# Altium PCB LV_hairDrier.PcbDoc
Units mil, origin at the board's own origin, x right, y up, seen from the top; angles counter-clockwise.
Board outline 750 x 750 mil, 4 copper layers (Top Layer, GND, SIGNAL, Bottom Layer), stack 23.756 mil thick; 49 components, 27 nets, 136 pads, 81 vias.
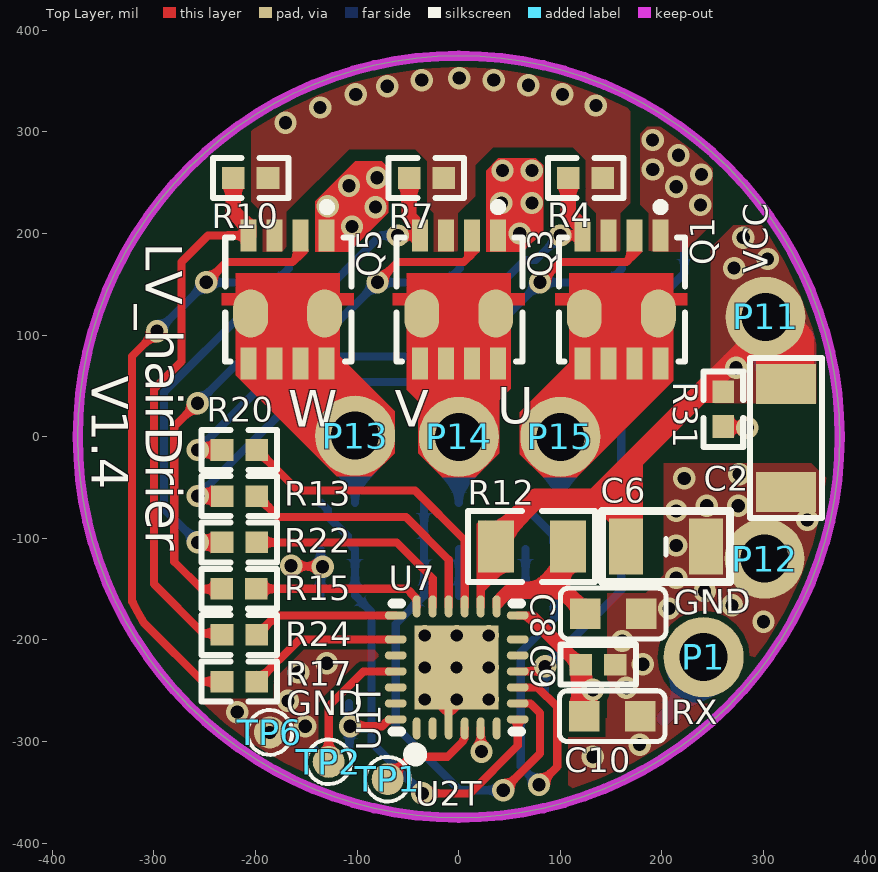
[diagram p0: Top Layer view]
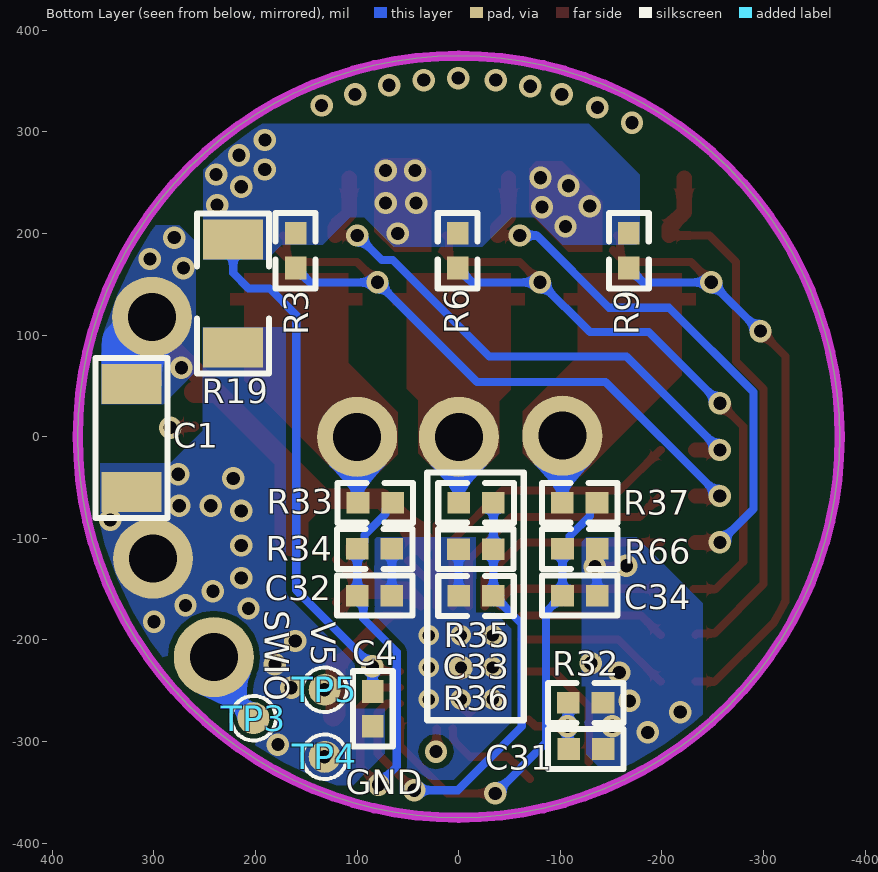
[diagram p1: Bottom Layer view, seen from below]
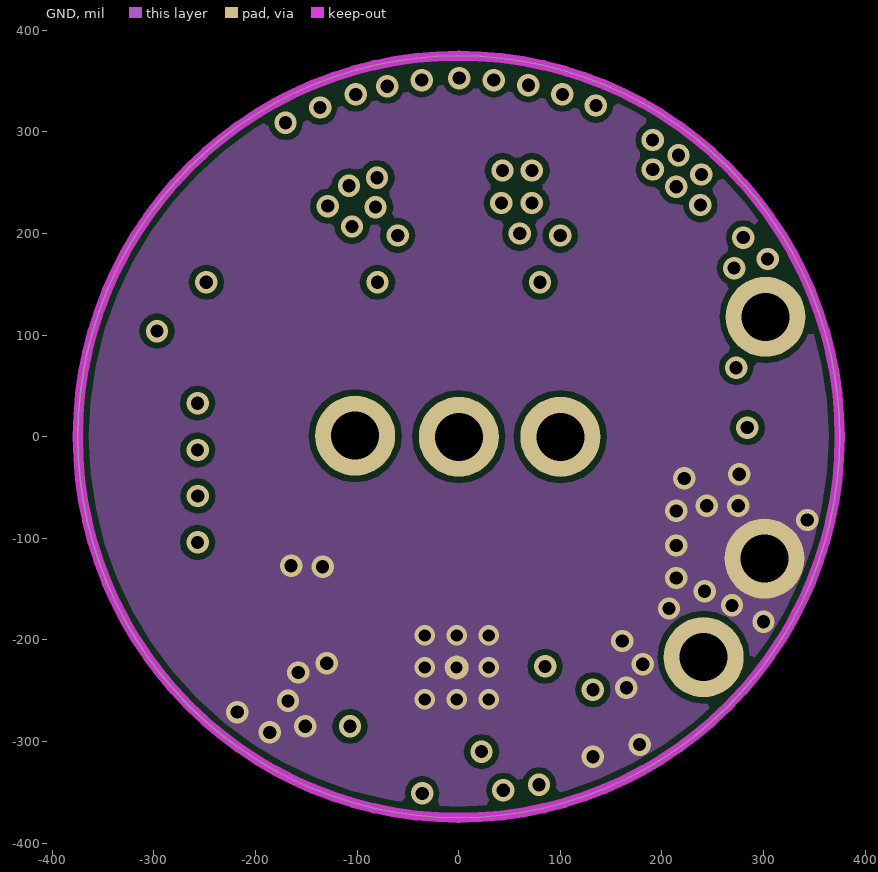
[diagram p2: GND]
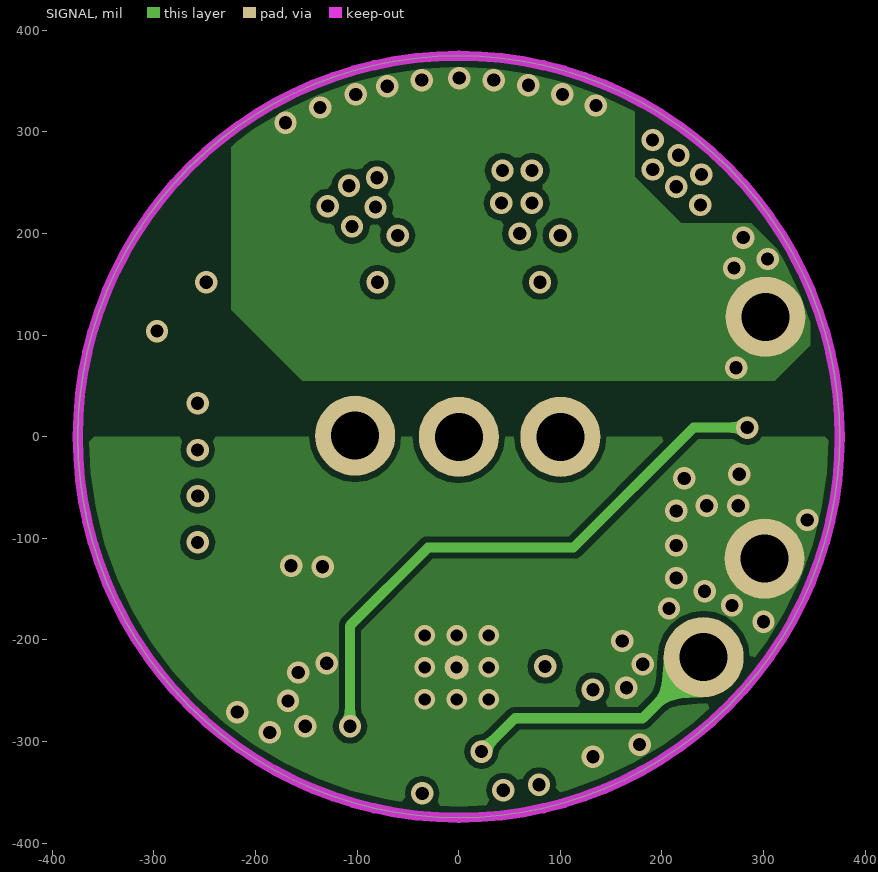
[diagram p3: SIGNAL]
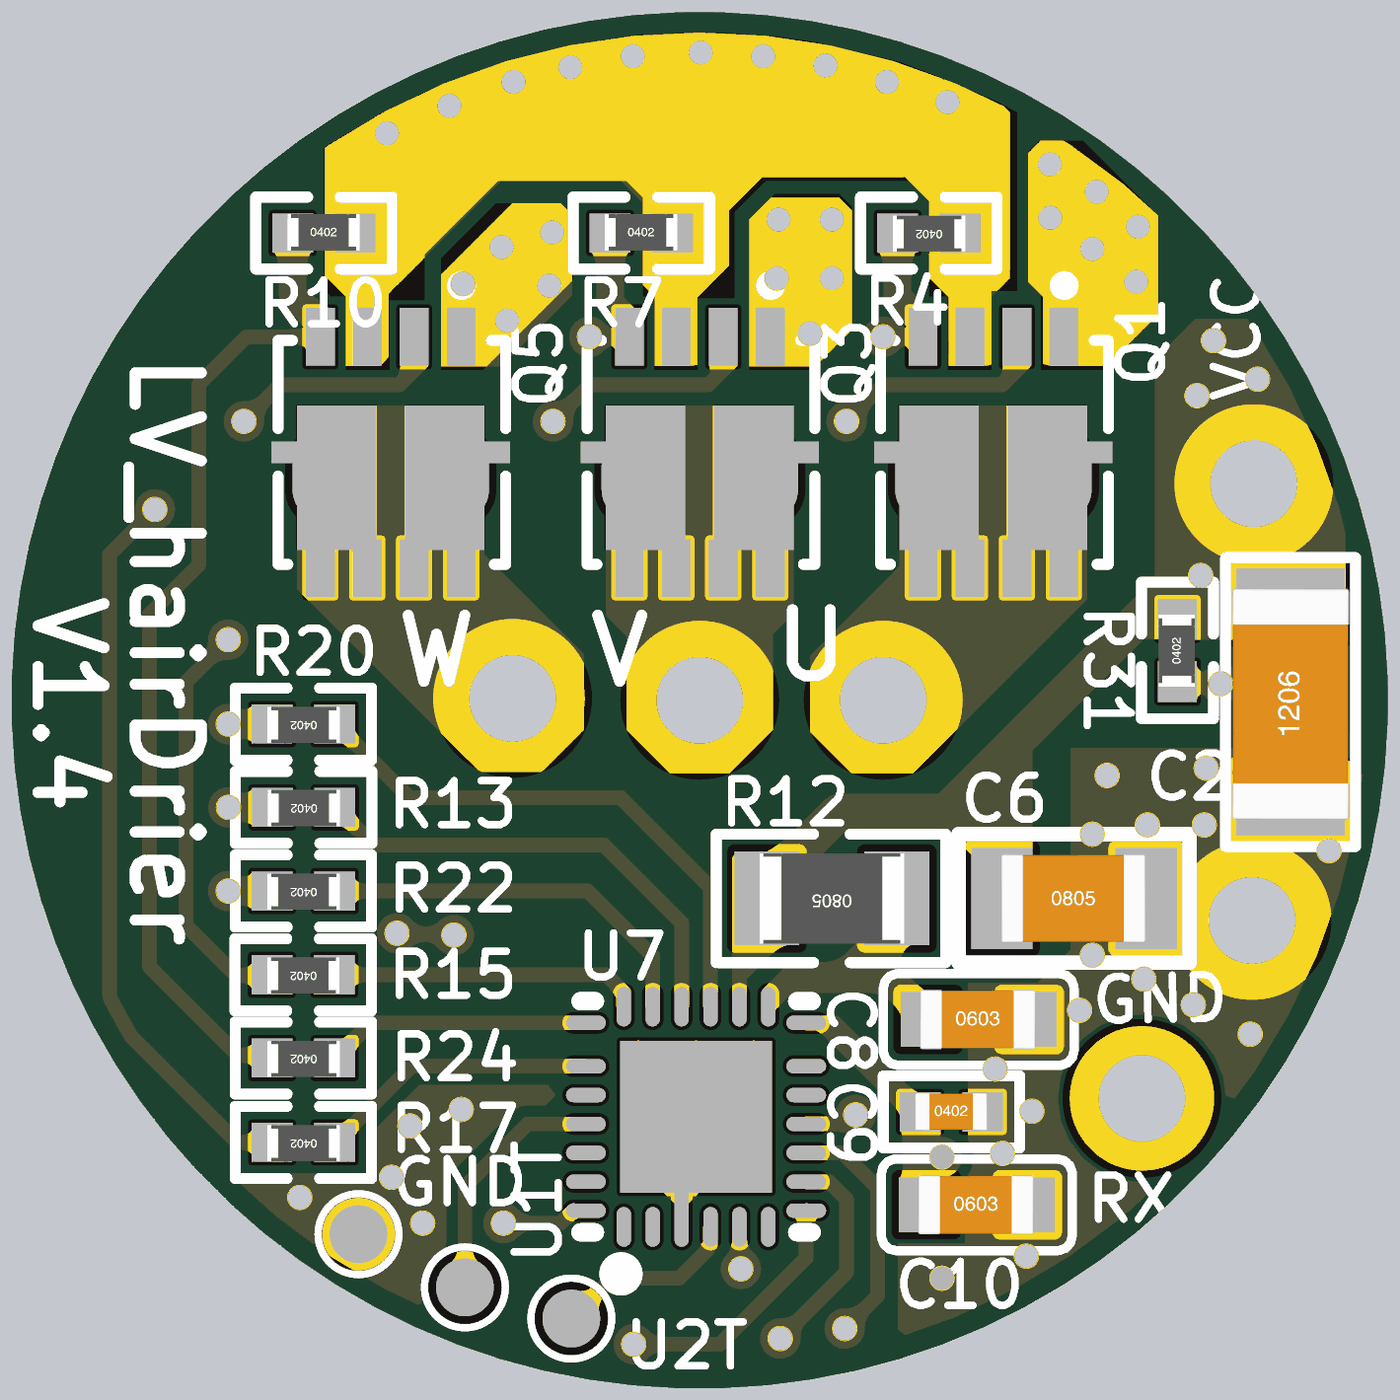
[diagram p4: 3D render of the assembled board from above, using the file's embedded part models]
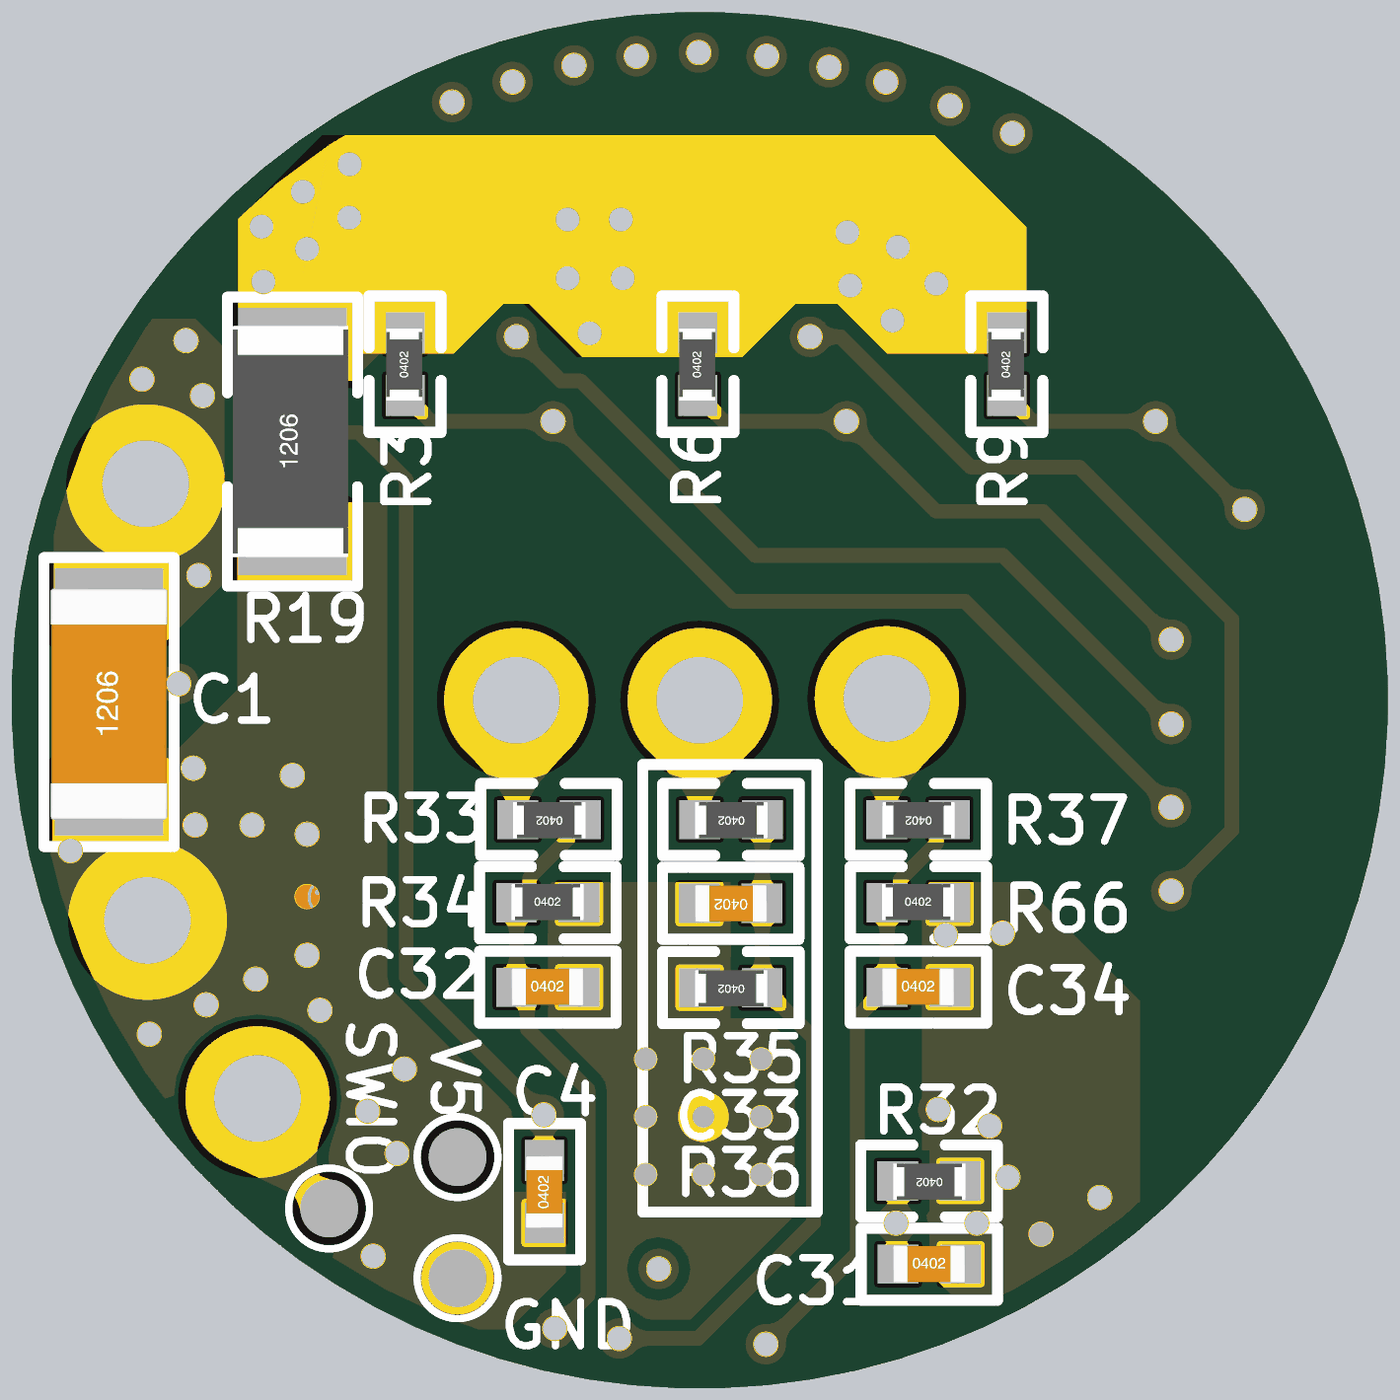
[diagram p5: 3D render of the assembled board from below, using the file's embedded part models]

## Layer stack, top to bottom
Top Solder: solder mask 0.4, Solder Resist, Dk 3.5
Top Layer: signal copper 1.4
Dielectric1: prepreg 2.8, PP-006, Dk 4.1
GND: signal copper 1.378
Dielectric2: dielectric 12.6, FR-4, Dk 4.8
SIGNAL: signal copper 1.378
Dielectric3: prepreg 2.8, PP-006, Dk 4.1
Bottom Layer: signal copper 1.4
Bottom Solder: solder mask 0.4, Solder Resist, Dk 3.5

## Board outline
-375,0 ccw(c0,0) 0,-375 ccw(c0,0) 375,0 ccw(c0,0) 0,375 ccw(c0,0)

## Design rules (kind name [scope] priority, off if disabled: settings)
Clearance [All] p1: gap=6 ignorepadtopadclearanceinfootprint=FALSE except(0: Arc-Hole Track-Hole SMDPad-Hole THPad-Hole Via-Hole Fill-Hole Poly-Hole Region-Hole Text-Hole)
PolygonConnect [All] p1: connectstyle=Direct reliefconductorwidth=10 reliefentries=4 polygonreliefangle="90 Angle" airgapwidth=10
RoutingVias [All] p1: holewidth=13 width=22 viastyle="Through Hole" minholewidth=13 minwidth=22 maxholewidth=28 maxwidth=50
SolderMaskExpansion [All] p1: expansion=4 istentingtop=FALSE
Width [All] p1: maxlimit=100 minlimit=8 preferedwidth=10 midlayer1_minwidth=10 midlayer1_maxwidth=10 midlayer2_minwidth=10 midlayer2_maxwidth=10 minimp=50.000000 maximp=50.000000 favimp=50.000000
30 further rules are at their usual default settings.

## Components (designator, comment, footprint, x,y, rotation, side; value= is the part's Value field where it differs from the comment)
C1 "47uF/25V" M_C1206- 322,-1 r90 bottom
C2 "47uF/25V" M_C1206- 322,-1 r90 top
C4 "NC(100pF)" M_C0402- 85,-267 r90 bottom
C6 "10uF/25V" M_C0805- 204,-108 r0 top
C8 "2.2uF/25V" M_C0603 152,-172 r0 top
C9 "0.1uF" M_C0402- 138,-224 r0 top
C10 "10uF" M_C0603 151,-273 r0 top
C31 "0.1uF" M_C0402- -126,-307 r180 bottom
C32 "1nF" M_C0402- 82,-156 r180 bottom
C33 "1nF" M_C0402- -16,-111 r0 bottom
C34 "1nF" M_C0402- -120,-156 r180 bottom
P1 "RX" M_PAD-1.2/2 243,-218 r0 top
P11 "VCC" M_PAD-1.2/2 304,117 r0 top
P12 "GND" M_PAD-1.2/2 303,-121 r0 top
P13 "W" M_PAD-1.2/2 -100,0 r0 top locked
P14 "V" M_PAD-1.2/2 2,-1 r0 top locked
P15 "U" M_PAD-1.2/2 102,-1 r0 top locked
Q1 "" M_DFN-8_L3.3_W3.2_2 160,150 r180 top
Q3 "" M_DFN-8_L3.3_W3.2_2 0,150 r180 top
Q5 "" M_DFN-8_L3.3_W3.2_2 -168.46,150 r180 top
R3 "20k" M_R0402- 162,184 r90 bottom
R4 "NC(20k)" M_R0402- 124,253.26 r180 top
R6 "20k" M_R0402- 2.37,184 r90 bottom
R7 "NC(20k)" M_R0402- -31,256 r0 top
R9 "20k" M_R0402- -166,184 r90 bottom
R10 "NC(20k)" M_R0402- -204,256 r0 top
R12 "100 Ω" M_R0805- 72,-108 r180 top
R13 "47Ω" M_R0402- -216.73,-59.74 r180 top
R15 "47Ω" M_R0402- -217,-151 r180 top
R17 "47Ω" M_R0402- -216.86,-242.37 r180 top
R19 "0R005/1W" M_R1206- 223,140 r90 bottom
R20 "47Ω" M_R0402- -216.86,-14.37 r180 top
R22 "47Ω" M_R0402- -216.86,-105.37 r180 top
R24 "47Ω" M_R0402- -216.86,-196.37 r180 top
R31 "5.1k 1%" M_R0402- 259,28 r90 top
R32 "2k 1%" M_R0402- -124.14,-263.37 r0 bottom
R33 "5.1k 1%" M_R0402- 83,-66.37 r0 bottom
R34 "2k 1%" M_R0402- 82,-109 r180 bottom
R35 "5.1k 1%" M_R0402- -16.22,-66.37 r0 bottom
R36 "2k 1%" M_R0402- -16.14,-158 r0 bottom
R37 "5.1k 1%" M_R0402- -118.22,-66.37 r0 bottom
R66 "2k 1%" M_R0402- -120,-109 r180 bottom
TP1 "U2T" TEST-0.8 -70,-337 r0 top
TP2 "U1T" TEST-0.8 -128,-320 r0 top
TP3 "SWIO" TEST-0.8 202,-277 r90 bottom
TP4 "GND" TEST-0.8 132,-315 r180 bottom
TP5 "V5" TEST-0.8 132,-249 r180 bottom
TP6 "GND" TEST-0.8 -186,-291 r0 top
U7 "CH32M007E8U" QFN26C_3X3 -2,-227 r0 top

## Footprints (in the part's own frame and the unit in brackets; to place one, negate y for a bottom-side part, rotate by r counter-clockwise, add the part's x,y. Pads: shape width x height; smd on the part's side, far side on the other; paste and mask are expansions set on the pad)
M_C0402- [mm]
  rect 0.566x0.54 smd mask+0.051: 1(-0.454,-0.009) 2(0.412,-0.009)
  silkscreen extent -0.97,-0.51 0.92,0.49, body extent -0.53,-0.27 0.47,0.25, height 0.53
M_C0603 [mil]
  rect 30x30 smd: 1(-27.5,-2) 2(27.5,-2)
  silkscreen extent -52,-27 52,23, body extent -32,-18 31,14, height 32
M_C0805- [mm]
  rect 0.85x1.4 smd: 1(-1,0) 2(1,0)
  silkscreen extent -1.6,-0.89 1.6,0.89, body extent -1.01,-0.61 0.99,0.61, height 0.51
M_C1206- [mm]
  rect 1x1.5 smd: 1(-1.35,0) 2(1.35,0)
  silkscreen extent -2,-0.9 2,0.9, body extent -1.63,-0.81 1.57,0.81, height 1.21
M_DFN-8_L3.3_W3.2_2 [mm]
  rect 0.4x0.8 smd paste-100 mask+0.051: 1(-0.976,-1.222) 2(-0.326,-1.222) 3(0.324,-1.222) 4(0.974,-1.222) 5(0.974,1.978) 6(0.324,1.978) 7(-0.326,1.978) 8(-0.976,1.978)
  oval 0.87x1.2 smd: 9(-0.926,0.728) 10(0.924,0.728)
  Top Layer region: -1.651,0.228 -1.651,0.528 -1.301,0.528 -1.301,1.728 -0.201,1.728 -0.201,-0.272 -1.301,-0.272 -1.301,0.228
  Top Layer region: 1.649,0.228 1.649,0.528 1.299,0.528 1.299,1.728 0.199,1.728 0.199,-0.272 1.299,-0.272 1.299,0.228
  silkscreen extent -1.59,-2.03 1.56,1.93
M_PAD-1.2/2 [mm]
  round 2 hole 1.2 mask+0.1: 1(-0.051,0.025)
M_R0402- [mm]
  rect 0.566x0.54 smd mask+0.051: 1(-0.454,-0.035) 2(0.412,-0.035)
  silkscreen extent -0.97,-0.53 0.92,0.46, body extent -0.53,-0.28 0.47,0.22, height 0.3
M_R0805- [mm]
  rect 0.9x1.3 smd: 1(-0.9,0) 2(0.9,0)
  silkscreen extent -1.57,-0.89 1.6,0.89, body extent -1,-0.63 1,0.63, height 0.5
M_R1206- [mm]
  rect 1x1.5 smd: 1(-1.325,-0.025) 2(1.375,-0.025)
  silkscreen extent -1.97,-0.93 2.03,0.87, body extent -1.57,-0.8 1.63,0.8, height 0.55
QFN26C_3X3 [mm]
  rect 2.1x2.1 smd mask+0.051: 0(0,0)
  round 0.6 hole 0.3 mask+0.051: 0(0,0)
  oval 0.2x0.55 smd mask+0.051: 1(-1,-1.525) 2(-0.6,-1.525) 4(0.2,-1.525) 5(0.6,-1.525) 6(1,-1.525) 14(1,1.525) 15(0.6,1.525) 16(0.2,1.525) 17(-0.2,1.525) 18(-0.6,1.525) 19(-1,1.525)
  oval 0.2x1 smd mask+0.051: 3(-0.2,-1.3)
  oval 0.55x0.2 smd mask+0.051: 7(1.525,-1.3) 8(1.525,-0.9) 9(1.525,-0.5) 10(1.525,-0.1) 11(1.525,0.3) 12(1.525,0.7) 13(1.525,1.3) 20(-1.525,1.3) 21(-1.525,0.7) 22(-1.525,0.3) 23(-1.525,-0.1) 24(-1.525,-0.5) 25(-1.525,-0.9) 26(-1.525,-1.3)
  silkscreen extent -1.6,-2.33 1.6,1.6
TEST-0.8 [mm]
  round 0.8 smd: 1(0,0)
  silkscreen extent -0.56,-0.56 0.56,0.56

## Part data
C1 C2 C4 C6 C8 C9 C10 C31 C32 C33 C34: library part "Cap Semi", "Capacitor (Semiconductor SIM Model)"
P1 P11 P12 P13 P14 P15: library part 1PIN, "CONNECTOR"
Q1 Q3 Q5: library part WSD3043DN
R3 R4 R6 R7 R9 R10 R12 R13 R15 R17 R19 R20 R22 R24 R31 R32 R33 R34 R35 R36 R37 R66: library part Res2, "Resistor"
TP1 TP2 TP3 TP4 TP5 TP6: library part Testpoint, "测试点"
U7: library part CH32M007E8U6, "RISC-V MCU, 48MHz, OPA/CMP/UART/I2C, 24V P/NMOS gate driver for motor"

## Via types
v1: diameter 22, hole 13, Top Layer to Bottom Layer, tented both sides, 73 vias
v2: diameter 20, hole 12, Top Layer to Bottom Layer, tented both sides, 8 vias

## Nets (pads, with @x,y where several pads share a name; then routed paths per layer and width w, separated by ;. In a path a pad name is that pad's centre, name@x,y a point inside that pad or via, vN(x,y) a via of type N, cw(c..) or ccw(c..) an arc to the next point about the centre after c; other vN are vias at no path point)
ADC_Vbus: C31.1 R31.1 R32.2 U7.26 | length 681.8
  Top Layer w8: v1(-107,-285) -75.69,-285 U7.26@-68.87,-278.18
  Top Layer w10: R31.1 260.94,9.57 283.43,9.57 v1(284,9)
  SIGNAL w10: v1(-107,-285) -107.14,-284.86 -107.14,-186.14 -30,-109 113,-109 231,9 v1(284,9)
  Bottom Layer w8: C31.1 -107.57,-306.8 -107.57,-285.57 v1(-107,-285) ; v1@-108.03,-285 -108.03,-262.11 R32.2
BEMF_U: C32.1 R33.1 R34.1 U7.9 | length 446.6
  Top Layer w8: U7.9 77.69,-246.69 97,-266 97,-324.44 v1(79.01,-342.43)
  Bottom Layer w8: R33.1 65.37,-65 72,-71.63 72,-76 92.73,-96.73 92.73,-103.74 99.36,-110.37 R34.1 C32.1 94,-162.24 94,-179 61,-212 61,-324.42 v1(79.01,-342.43)
BEMF_V: C33.1 R35.1 R36.1 U7.8 | length 480.6
  Top Layer w8: v1(43.87,-347.87) 80,-311.74 80,-272 70.5,-262.5 58.1,-262.5 U7.8
  Bottom Layer w8: R35.1 -34.04,-65.04 -34.04,-110.63 R36.1 R36.1 -34.51,-156.63 -62,-184.12 -62,-285 0.87,-347.87 v1(43.87,-347.87)
BEMF_W: C34.1 R37.1 R66.1 U7.7 | length 468.2
  Top Layer w8: v1(-36,-351) 11.04,-351 58.04,-304 U7.7
  Bottom Layer w8: R37.1@-136.47,-65.39 R37.1 -135.63,-65 -129,-71.63 -129,-78 -109.27,-97.73 -109.27,-103.74 -102.64,-110.37 R66.1 C34.1 -101.63,-156.37 -95,-163 -95,-163.51 -86,-172.51 -86,-301 v1(-36,-351)
GND: C1.1 C2.1 C4.1 C6.2 C8.2 C9.2 C10.2 C31.2 C32.2 C33.2 C34.2 P12.1 R19.1 R32.1 R34.2 R36.2 R66.2 TP4.1 TP6.1 U7.0 U7.3 | length 169.6
  Top Layer w8: v1(-165,-127) -164.5,-127.5 -134.5,-127.5 v1(-134,-128)
  Bottom Layer w8: C31.2 C31.2@-142.11,-307.26 ; C34.2 R66.2 ; R36.2 R36.2 0.15,-110.7 C33.2 ; C32.2 R34.2
  other v1: 132,-315 178,-303 -186,-291 -151,-285 -218,-271 -168,-260 165,-247 -158,-232 181,-224 -130,-223 161,-201 300,-182 207,-169 269,-166 242,-152 214,-139 214,-107 343,-82 214,-73 244,-68 275,-68 222,-41 276,-37
  other v2: -33.5,-258.5 -2,-258.5 29.5,-258.5 -33.5,-227 29.5,-227 -33.5,-195.5 -2,-195.5 29.5,-195.5
I1_shunt: C4.2 Q1.1 Q3.1 Q5.1 R3.2 R6.2 R9.2 R19.2 U7.10 | length 543.1
  Top Layer w8: U7.10 58.1,-230.87 76.34,-230.87 81.21,-226 v1(85,-226)
  Bottom Layer w8: C4.2 84.82,-250.6 84.82,-226.18 v1(85,-226) 160,-151 160,120 186,146 207,146 222,161 R19.2
  other v1: 60,200 -105,207 -82,226 -129,227 237.82,228.1 42,230 72,230 214,246 -108,247 -80.46,255 238.82,258.1 43,262 72,262 191,263 216.32,277.1 190.82,292.1
M1_CH1_H: R20.1 U7.16 | length 306.8
  Top Layer w8: R20.1 -198.49,-13 -158.49,-53 -43,-53 5.87,-101.87 U7.16
M1_CH1_L: R13.1 U7.17 | length 260.8
  Top Layer w8: R13.1 -198.36,-58.37 -177.73,-79 -52,-79 -9.88,-121.12 U7.17
M1_CH2_H: R22.1 U7.18 | length 215.6
  Top Layer w8: R22.1 -61,-104 -25.63,-139.37 U7.18
M1_CH2_L: R15.1 U7.19 | length 169.4
  Top Layer w8: R15.1 -51.06,-149.63 -41.44,-159.25 -41.44,-166.9 U7.19
M1_CH3_H: R24.1 U7.20 | length 144.9
  Top Layer w8: R24.1 -198.49,-195 -179.31,-175.82 U7.20
M1_CH3_L: R17.1 U7.21 | length 154.2
  Top Layer w8: R17.1 -198.49,-241 -156.94,-199.44 U7.21
M1_U: P15.1 Q1.5 Q1.6 Q1.7 Q1.8 Q1.9 Q1.10 R33.2 | length 65.3
  Bottom Layer w8: R33.2 99.61,-64.61 99.61,-0.39 P15.1
M1_V: P14.1 Q3.5 Q3.6 Q3.7 Q3.8 Q3.9 Q3.10 R35.2 | length 65
  Bottom Layer w8: R35.2 P14.1
M1_W: P13.1 Q5.5 Q5.6 Q5.7 Q5.8 Q5.9 Q5.10 R37.2 | length 66
  Bottom Layer w8: R37.2 P13.1
NetC8_1: C8.1 R12.1 U7.14 | length 441.4
  Top Layer w8: R12.1@104,-129 95.18,-137.82 ; R12.1 107.43,-115.87 R12.1@104.64,-118.67 ; C8.1@119.5,-174 101.07,-155.57 ; C8.1@121,-163 112.82,-154.82 ; R12.1@121,-120.82 104.64,-137.18 ; U7.14@37.43,-160.13 46.56,-151 ; U7.14@37.43,-160.13 37.36,-160.2 U7.14 44.19,-160.13 ; U7.14@37.43,-160.13 44.19,-160.13 ; 44.19,-160.13 48.76,-155.57 ; 46.56,-151 50.92,-146.64 76.67,-146.64 ; 46.56,-151 53.32,-151 ; 48.76,-155.57 77.43,-155.57 ; 48.76,-155.57 53.32,-151 ; 53.32,-151 72.31,-151 76.67,-146.64 ; 76.67,-146.64 R12.1@104.64,-118.67 ; 76.67,-146.64 86.36,-146.64 ; 77.43,-155.57 81.9,-151.1 ; 77.43,-155.57 101.07,-155.57 ; 81.9,-151.1 86.36,-146.64 ; 81.9,-151.1 109.1,-151.1 ; 86.36,-146.64 104,-146.64 ; 86.36,-146.64 95.18,-137.82 ; 95.18,-137.82 99.59,-142.23 ; 99.59,-142.23 104,-146.64 ; 99.59,-142.23 104.64,-137.18 ; 101.07,-155.57 112.07,-155.57 112.82,-154.82 ; 104,-146.64 104.64,-146.64 ; 104.64,-146.64 104.64,-137.18 ; 104.64,-146.64 109.1,-151.1 ; 104.64,-137.18 R12.1@104.64,-118.67 ; 109.1,-151.1 112.82,-154.82
NetQ1_2: Q1.2 R3.1 R13.2 | length 666.3
  Top Layer w8: v1(80,152) 100,172 164.95,172 169.64,176.69 ; Q1.2 169.64,194.92 169.64,176.69 ; Q1.2@176,183.05 169.64,176.69
  Top Layer w15: v1(-256.86,-58.37) R13.2
  Bottom Layer w8: v1(-256.86,-58.37) -144.5,54 -18,54 v1(80,152) 146.49,152 153.49,159 154,159 160.63,165.63 R3.1
NetQ1_4: Q1.4 R4.2 R20.2 | length 552.3
  Top Layer w8: v1(99.9,198.1) Q1.4
  Top Layer w15: v1(-257,-13) R20.2 ; R4.2 107.78,219.84 121.65,205.97 Q1.4
  Bottom Layer w8: v1(-257,-13) -165,79 -30,79 65,174 75.8,174 v1(99.9,198.1)
NetQ3_2: Q3.2 R6.1 R15.2 | length 670.7
  Top Layer w8: v1(-257,33) -280,10 -280,-123 -253,-150 R15.2@-231,-150 ; v1(-80,152) -60,172 4.95,172 9.64,176.69 ; Q3.2 9.64,194.92 9.64,176.69 ; Q3.2@16,183.05 9.64,176.69
  Bottom Layer w8: v1(-257,33) -187,103 -129,103 v1(-80,152) -13.14,152 -6.14,159 -5.63,159 1,165.63 R6.1
NetQ3_4: Q3.4 R7.1 R22.2 | length 562
  Top Layer w8: v1(-60.1,198.1) Q3.4
  Top Layer w15: v1(-257,-104) R22.2 ; R7.1 -48.86,216.49 -38.35,205.97 Q3.4
  Bottom Layer w8: v1(-257,-104) -290,-71 -290,44 -207,127 -148,127 -76.9,198.1 v1(-60.1,198.1)
NetQ5_2: Q5.2 R9.1 R17.2 | length 688.9
  Top Layer w8: v1(-297,104) -321.73,79.27 -321.73,-159.62 ccw(c-313.73,-159.62) -320.88,-163.21 ccw(c0,0) -310.32,-182.49 ccw(c-303.42,-178.44) -308.91,-184.26 -306.02,-186.99 cw(c-311.48,-192.84) -305.82,-187.18 -252,-241 R17.2 ; v1(-248.46,152) -228.46,172 -163.51,172 -158.82,176.69 ; Q5.2 -158.82,194.92 -158.82,176.69 ; Q5.2@-152,183.51 -158.82,176.69
  Bottom Layer w8: v1@-296.73,103.73 v1(-248.46,152) -181.51,152 -174.51,159 -174,159 -167.37,165.63 R9.1
NetQ5_4: Q5.4 R10.1 R24.2 | length 555.6
  Top Layer w8: R24.2 -234.61,-193.47 -251.53,-193.47 -300,-145 -300,47 -273,74 -273,172 -246.9,198.1 Q5.4
  Top Layer w15: R10.1 -221.86,221.03 -206.81,205.97 Q5.4
SWIO: P1.1 TP3.1 U7.5 | length 356.5
  Top Layer w8: U7.5 21.69,-287.1 21.69,-309.21 v1(22.41,-309.93)
  SIGNAL w10: v1(22.41,-309.93) 55.34,-277 181,-277 P1.1
  Bottom Layer w15: TP3.1 228.8,-250.2 228.8,-229.2 P1.1
U1_TX: TP2.1 U7.23 | length 135.1
  Top Layer w8: TP2.1 -128,-265 -93.94,-230.94 U7.23
U2_TX: TP1.1 U7.4 | length 102.9
  Top Layer w8: TP1.1 -48,-315 -11.23,-315 4.07,-299.7 4.07,-298.57 5.82,-296.82 5.82,-287.1 U7.4
V5: C9.1 C10.1 TP5.1 U7.13 | length 216.7
  Top Layer w8: U7.13 58.1,-175.88 U7.13@66.38,-175.88 ; U7.13@66.38,-175.88 120,-229.5 120,-222 73.88,-175.88 U7.13@66.38,-175.88
  Top Layer w20: C9.1 120.64,-224.37 121.27,-225 121.27,-272.77 C10.1
  other v1: 132,-249
Vbus: C1.2 C2.2 C6.1 P11.1 Q1.3 Q3.3 Q5.3 R4.1 R7.2 R10.2 R12.2 R31.2 U7.15 | length 1106.5
  Top Layer w8: R12.2@21.62,-87 R12.2@21.62,-130.83 ; R12.2 36.57,-115.87 R12.2@29,-123.44 ; R12.2@50,-122 29,-143 ; R12.2@21.62,-130.83 R12.2@29,-123.44 ; R12.2@21.62,-130.83 21.62,-150.32 U7.15 21.68,-166.9 21.68,-150.32 29,-143 ; 29,-143 R12.2@29,-123.44
  Top Layer w20: R12.2 35,-106.43 35,-101.69 75.69,-61 134,-61 ; 157.9,-54.1 157.9,-61 157.9,-70.61 ; 158.39,-70.61 157.9,-70.61 ; R31.2@260.16,44 R31.2 260.37,43.71 259.74,43.08 238.08,43.08 ; P11.1 302,107 268,73 238.08,43.08 ; C2.2@312.79,52.15 C2.2 ; 134,-61 138.9,-61 ; 134,-61 171,-24 ; 138.9,-61 148.28,-61 157.9,-70.61 ; 138.9,-61 157.9,-80 ; 157.9,-80 157.9,-70.61 ; 157.9,-80 157.9,-101.27 C6.1 171.36,-101.27 171.36,-24.36 171,-24 ; 171,-24 238.08,43.08
  Top Layer w40: C2.2@312.47,52.46 312.47,81.53 309.41,84.59 309.41,110.59 P11.1 306,118 330.36,93.64 330.36,81.53 C2.2@330.36,52.46
  Bottom Layer w40: P11.1@302,107.52 312.47,97.04 312.47,52.46 312.79,52.15 C1.2 330.59,52.15 330.91,52.46 330.91,94 306.91,118 P11.1 P11.1@302,107.52
  other v1: 273,68 271,166 304,175 280,196 -170.46,309 -136.46,324 135,326 -101.46,337 102,337 -70.46,345 68.54,346 -36.46,351 34.54,351 0.54,353
pads on no net: U7.1 U7.2 U7.6 U7.11 U7.12 U7.22 U7.24 U7.25

## Polygon pours and split planes (outlines as drawn)
GND on Top Layer "NONET_L03_P-001" (solid, remove dead copper, pour order 14): -253,-278 -253,-242 -252,-241 -198.49,-241 -156.94,-199.44 -62.44,-199.44 -128,-265 -128,-353 -178,-353
Vbus on Top Layer "NONET_L03_P-001" (solid, remove dead copper, pour order 5): 251,33 248,36 248,186 270,208 302,208 352,158 352,33
GND on Top Layer "NONET_L03_P-001" (solid, remove dead copper, pour order 4): 146,-277 108,-277 108,-351 181,-351 209,-323 369,-163 369,-48 347,-26 202,-26 202,-136 184,-154 146,-154
I1_shunt on Top Layer "NONET_L03_P-001" (solid, remove dead copper, pour order 1): 187,182.1 187,220 178.82,228.18 178.82,298.1 185.72,305 217.92,305 249.82,273.1 249.82,210.1 221.82,182.1
Vbus on Top Layer "NONET_L03_P-001" (solid, remove dead copper, pour order 0): 135.52,182 135.52,219.85 125,230.37 125,243.41 125,272 112,285 34,285 16,267 16,236.9 -1.08,219.82 -1.08,182 -24.48,182 -24.48,219.85 -31,226.37 -31,271 -43,283 -108,283 -169.54,221.46 -169.54,182 -192.94,182 -192.94,219.85 -204.46,231.37 -204.46,314 -143.46,375 114.54,375 169,320.54 169,229.9 158.92,219.82 158.92,182
GND on Bottom Layer "NONET_L03_P-001" (solid, remove dead copper, pour order 11): -121,-308 -139,-326 -195,-326 -240,-281 -240,-164 -175,-99 -121,-99 -121,-241
GND on Bottom Layer "NONET_L03_P-001" (solid, remove dead copper, pour order 9): -17,-99 -17,-154 -62,-199 -62,-293 -7.13,-347.87 59,-347.87 59,-214 83,-190 83,-99
Vbus on Bottom Layer "NONET_L03_P-001" (solid, remove dead copper, pour order 7): 291,32 259,64 259,192 275,208 299,208 352,155 352,32
GND on Bottom Layer "NONET_L03_P-001" (solid, remove dead copper, pour order 6): 159,-151 73,-237 73,-312 104,-343 174,-343 353,-164 353,-26 284,-26 252,6 252,108 159,108
I1_shunt on Bottom Layer "NONET_L03_P-001" (solid, remove dead copper, pour order 2): 174,189 189,174 214.27,174 251.54,174 251.54,263 206.54,308 -128,308 -178,258 -178,189 -102,189 -75,216 -52,216 -23,187 64,187 93,216 107,216 134,189
GND on SIGNAL "NONET_L03_P-001" (solid, remove dead copper, pour order 13): -375,0 376,0 376,-155 156,-375 -155,-375 -375,-155
Vbus on SIGNAL "NONET_L03_P-001" (solid, remove dead copper, pour order 3): -224,285 -224,125 -154,55 311,55 346,90 346,152 288,210 219,210 173,256 173,335 133,375 -134,375
GND on GND "NONET_L03_P-001" (solid, remove dead copper, pour order 8): 155,-375 375,-155 375,156 156,375 -156,375 -375,156 -375,-156 -156,-375

## Keep-outs
Keep-Out Layer:
  circle w10: c0,0 r375

## Other copper
Top Layer:
  region net GND: -9.87,-278.18 -20,-268.05 -20,-268 0.31,-268
  region net M1_U: 108.86,160.7 108.86,72.86 60,24 60,-17 83,-40 116,-40 211.22,55.22 211.22,160.7
  region net M1_V: 51.22,160.7 51.22,47.22 40,36 40,-16 16,-40 -16,-40 -40,-16 -40,35 -51.14,46.14 -51.14,160.7
  region net M1_W: -117.24,160.7 -117.24,79.24 -63,25 -63,-16 -86,-39 -120,-39 -219.6,60.6 -219.6,160.7
  region net I1_shunt: 27,182 63,182 83,202 83,267 76,274 39,274 27,262
  region net I1_shunt: -76,271 -69.46,264.46 -69.46,220.54 -108,182 -141,182 -141,232 -102,271

## Silkscreen, mask and mechanical layers (free items; w line width, h text height)
Top Overlay:
  text "LV_hairDrier" at -308,191 h36 r270
  text "V1.4" at -361,60 h36 r270
Bottom Overlay:
  lines w6: -64,-279 -64,-35 31,-35 31,-279 -64,-279
Top Solder:
  region: 108,82 152,82 152,161 108,161
  region: 167,161 167,82 211,82 211,161
  region: -52,82 -8,82 -8,161 -52,161
  region: 7,161 7,82 51,82 51,161
  region: -161,161 -161,82 -117,82 -117,161
  region: -220,82 -176,82 -176,161 -220,161
  region: 27,180 27,262 41,276 76,276 83,269 83,202 61,180
  region: -141,180 -141,241 -111,271 -76,271 -69,264 -69,229 -118,180
  region: 179,228 179,299 185,305 209,305 250,264 250,210 220,180 186,180 186,221
  region: -193,220 -201,220 -205,224 -205,301 -204,302 -177,318 -172,321 -153,330 -140,336 -112,346 -104,349 -95,351 -71,357 -57,359 -45,361 -32,363 -21,363 -9,364 11,364 41,362 62,359 84,354 109,348 135,338 163,326 173,320.44 173,223 159,223 159,180 135,180 135,220 125,220 125,272 114,283 36,283 19,266 19,219 -1,219 -1,180 -25,180 -25,220 -31,220 -31,274 -40,283 -110,283 -150,243 -150,218 -169,218 -169,180 -193,180
Bottom Solder:
  region: -178,189 -178,258 -128,308 206,308 252,262 252,170 187,170 187,189 134,189 107,216 96,216 67,187 -23,187 -52,216 -75,216 -102,189
Mechanical 1:
  circle w10: c0,0 r375